# Altium PCB ESP8266-01-Breakout.PcbDoc
Units mil, origin at the board's own origin, x right, y up, seen from the top; angles counter-clockwise.
Board outline 590 x 900 mil, 2 copper layers (Top Layer, Bottom Layer); 8 components, 9 nets, 26 pads, 1 vias.
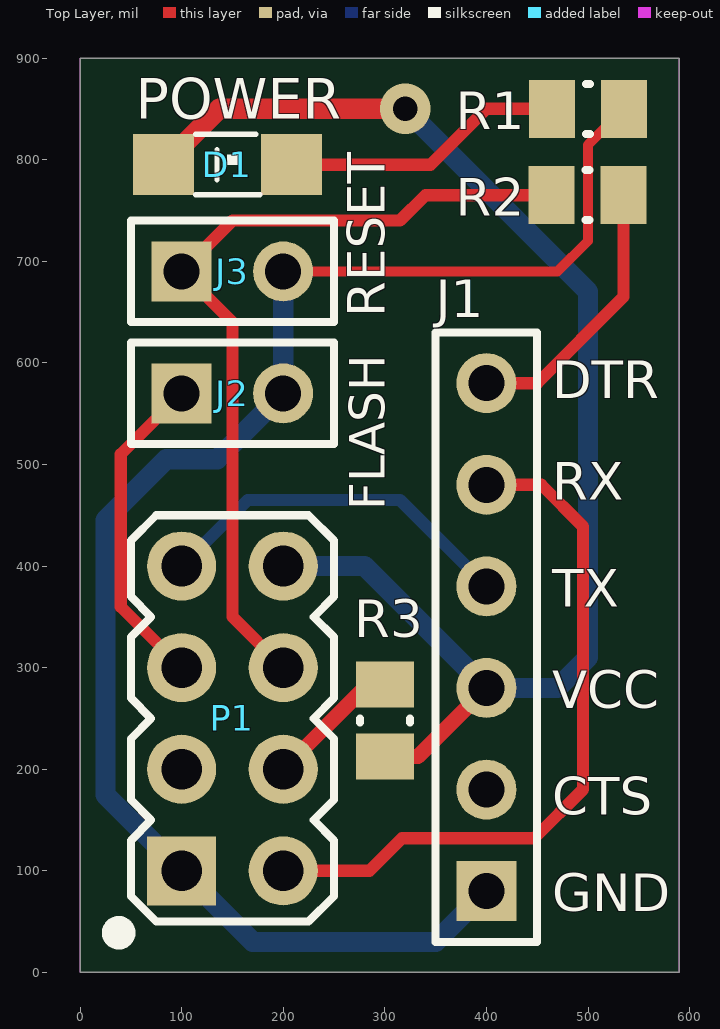
[diagram p0: Top Layer view]
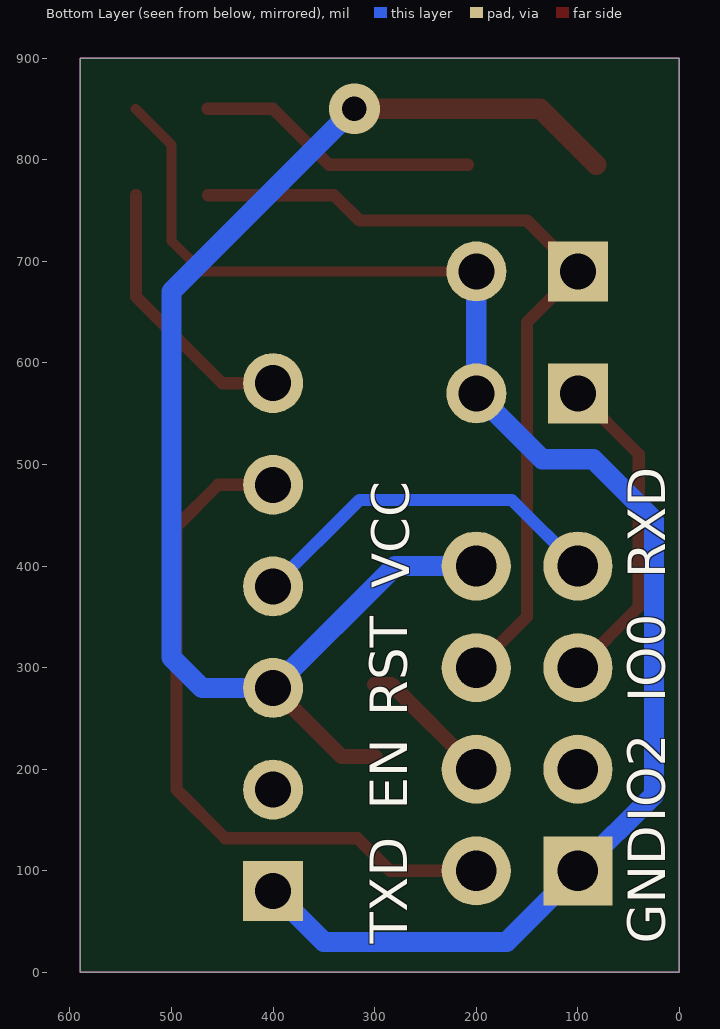
[diagram p1: Bottom Layer view, seen from below]

## Layer stack, top to bottom
Top Solder: solder mask 0.4, Solder Resist, Dk 3.5
Top Layer: signal copper 1.4
Dielectric 1: dielectric 12.6, FR-4, Dk 4.8
Bottom Layer: signal copper 1.4
Bottom Solder: solder mask 0.4, Solder Resist, Dk 3.5

## Board outline
0,0 590,0 590,900 0,900

## Design rules (kind name [scope] priority, off if disabled: settings)
Clearance [All] p1: gap=6 ignorepadtopadclearanceinfootprint=FALSE
HoleSize [All] p1: absolutevalues=TRUE maxlimit=260 minlimit=10 maxpercent=80.000 minpercent=20.000
MinimumAnnularRing [All] p1: minimumring=5
PlaneClearance [All] p1: clearance=10
PolygonConnect [All] p1: connectstyle=Relief reliefconductorwidth=10 reliefentries=4 polygonreliefangle="90 Angle" airgapwidth=10
RoutingVias [All] p1: holewidth=28 width=50 viastyle="Through Hole" minholewidth=28 minwidth=50 maxholewidth=28 maxwidth=50
SilkToSilkClearance [All] p1 off: silktosilkclearance=10
SolderMaskExpansion [All] p1: expansion=4
Width [All] p1: maxlimit=100 minlimit=6 preferedwidth=10
27 further rules are at their usual default settings.

## Classes and differential pairs
component class ESP8266-01-Breakout: J1 J2 J3 P1 R1 R2 R3

## Components (designator, comment, footprint, x,y, rotation, side; value= is the part's Value field where it differs from the comment)
D1 "POWER" LED-1206 145,795 r0 top
J1 "ICSP" HDR1X6 400,80 r90 top
J2 "FLASH" HDR1X2 100,570 r0 top
J3 "RESET" HDR1X2 100,690 r0 top
P1 "ESP8266-01" ESP8266-01 100,300 r0 top
R1 "RES_0805" CAPC0805(2012)75_N 500,850 r0 top value=1k
R2 "RES_0805" CAPC0805(2012)75_N 499.57,765 r180 top value=1k
R3 "RES_0805" CAPC0805(2012)75_N 300,248 r90 top value=10k

## Footprints (in the part's own frame and the unit in brackets; to place one, negate y for a bottom-side part, rotate by r counter-clockwise, add the part's x,y. Pads: shape width x height; smd on the part's side, far side on the other; paste and mask are expansions set on the pad)
CAPC0805(2012)75_N [mm] "Chip Capacitor, Body 2.0x1.2mm, Height 0.75mm, IPC Medium Density"
  rect 1.15x1.45 smd: 1(-0.9,0) 2(0.9,0)
  silkscreen extent -0.05,-0.62 0.05,0.63, body extent -1.51,-0.72 1.49,0.73, height 0.75
ESP8266-01 [mil]
  rect 68x68 hole 40: 1(0,-200)
  round 68 hole 40: 2(100,-200) 3(0,-100) 4(100,-100) 5(0,0) 6(100,0) 7(0,100) 8(100,100)
  silkscreen extent -70,-269 150,150
HDR1X2 [mm] "Connector; Header; 2 Position"
  rect 1.5x1.5 hole 0.9: 1(0,0)
  round 1.5 hole 0.9: 2(2.54,0)
  silkscreen extent -1.27,-1.27 3.81,1.27
HDR1X6 [mm] "Connector; Header; 6 Position"
  rect 1.5x1.5 hole 0.9: 1(0,0)
  round 1.5 hole 0.9: 2(2.54,0) 3(5.08,0) 4(7.62,0) 5(10.16,0) 6(12.7,0)
  silkscreen extent -1.27,-1.27 13.97,1.27
LED-1206 [mil]
  rect 60x60 smd: +(-62.99,0) -(63,0)
  silkscreen extent -31,-30 32,30

## Part data
D1: library part LED2, "Typical RED, GREEN, YELLOW, AMBER GaAs LED", LatestRevisionDate=17-Jul-2002, LatestRevisionNote="Re-released for DXP Platform.", PackageDescription="SM LED; 2 Flat Leads", PackageReference=3.2X1.6X1.1, PackageVersion=Feb-2002, Published=8-Jun-2000, Publisher="Altium Limited"
J1: library part "Header 6", "Header, 6-Pin", LatestRevisionDate=17-Jul-2002, LatestRevisionNote="Re-released for DXP Platform.", Publisher="Altium Limited"
J2 J3: library part "Header 2", "Header, 2-Pin", LatestRevisionDate=17-Jul-2002, LatestRevisionNote="Re-released for DXP Platform.", Publisher="Altium Limited"

## Via types
v1: diameter 50, hole 24, Top Layer to Bottom Layer, tented bottom, 1 vias

## Nets (pads, with @x,y where several pads share a name; then routed paths per layer and width w, separated by ;. In a path a pad name is that pad's centre, name@x,y a point inside that pad or via, vN(x,y) a via of type N, cw(c..) or ccw(c..) an arc to the next point about the centre after c; other vN are vias at no path point)
DTR: J1.6 R2.1 | length 270.2
  Top Layer w12: J1.6 450,580 535,665 R2.1
GND: J1.1 J2.2 J3.2 P1.1 R1.2 | length 1529.7
  Top Layer w10: J3.2 470,690 500,720 500,814.57 R1.2
  Bottom Layer w20: J3.2 J2.2 135,505 85,505 25,445 25,175 P1.1 170,30 350,30 J1.1
GPIO0: J2.1 P1.5 | length 319.7
  Top Layer w12: P1.5 40,360 40,510 J2.1
NetD1_2: D1.- R1.1 | length 279.3
  Top Layer w12: D1.- 345,795 400,850 R1.1
NetJ3_1: J3.1 P1.6 R2.2 | length 826.6
  Top Layer w12: P1.6 150,350 150,640 J3.1 150,740 315,740 340,765 460,765 R2.2
NetP1_4: P1.4 R3.2 | length 134.6
  Top Layer w15: P1.4 283.43,283.43 R3.2
RX: J1.5 P1.2 | length 699.1
  Top Layer w12: P1.2 285,100 317,132 447,132 495,180 495,439 454,480 J1.5
TX: J1.4 P1.7 | length 362.1
  Bottom Layer w12: P1.7 165,465 315,465 J1.4
VCC: D1.+ J1.3 P1.8 R3.1 | length 1365.4
  Top Layer w15: R3.1 332.57,212.57 J1.3
  Top Layer w20: D1.+ 137.01,850 v1(320,850)
  Bottom Layer w20: P1.8 280,400 J1.3 470,280 500,310 500,670 v1(320,850)
pads on no net: J1.2 P1.3

## Keep-outs
Keep-Out Layer:
  the board outline again, w1

## Silkscreen, mask and mechanical layers (free items; w line width, h text height)
Top Overlay:
  text "DTR" at 465,565 h37
  text "DTR" at 465,565 h37
  text "RX" at 465,465 h37
  text "TX" at 465,360 h37
  text "VCC" at 465,260 h37
  text "CTS" at 465,155 h37
  text "GND" at 465,60 h37
Bottom Overlay:
  text "RXD" at 14,388 h37 r270
  text "VCC" at 266,378 h37 r270
  text "IO0" at 14,266 h37 r270
  text "RST" at 268,252 h37 r270
  text "EN" at 268,160 h37 r270
  text "IO2" at 14,148 h37 r270
  text "GND" at 14,28 h37 r270
  text "TXD" at 268,28 h37 r270